# EAGLE board i2c_bridge (EAGLE 5.10)
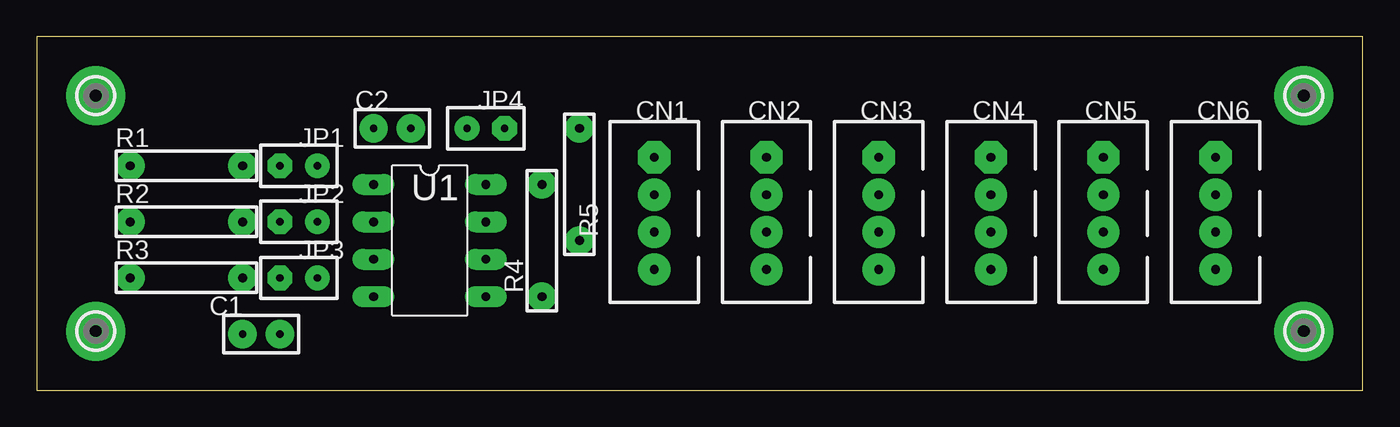
[diagram p0: board, top side]
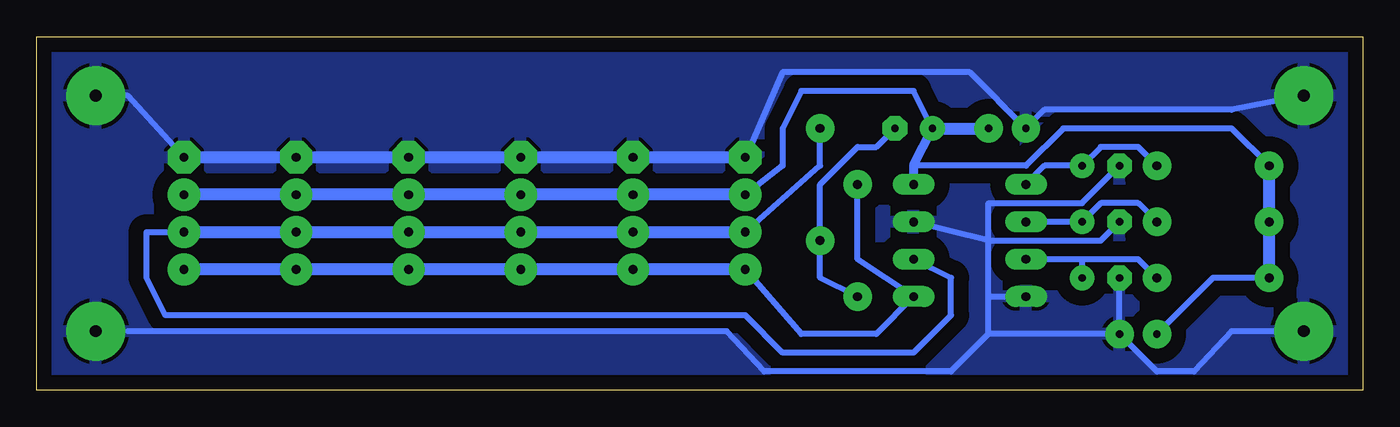
[diagram p1: board, bottom side, seen from below]

Size 90 x 24 mm. Coordinates in mm from the lower left corner, seen from the top.
Outline: 0,0 90,0 90,24 0,24 0,0
Copper layers (1*16): Top 0.035mm / dielectric 1.5mm / Bottom 0.035mm
Design rules "default": minimum track width 10mil, minimum drill 24mil, track to track 8mil, track to pad 8mil, pad to pad 8mil, via to via 8mil, smd to smd 8mil, copper to edge 40mil, drill to drill 8mil, minimum pad ring 10mil, minimum via ring 8mil, stop-mask expansion 4mil, vias tented up to drill 0mil, thermal gap 10mil

## Footprints (pad centres in the part's own frame; a part is rotated, then mirrored left to right if it is on the bottom)
CAP_DIP_1 = drill 0.5 pad 1.93 round: 1 -1.27,0; 2 1.27,0
CON_HRS_DIP_4 = drill 0.6 pad 2.184 octagon: 1 -3.81,0 | drill 0.6 pad 2.184 round: 2 -1.27,0; 3 1.27,0; 4 3.81,0
CON_PINHEAD_2 = drill 0.5 pad 1.676 octagon: 1 -1.27,0 | drill 0.5 pad 1.676 round: 2 1.27,0
PAD-2.1 = drill 0.8 pad 4 round: B2,1 0,0
R_0.125W_3 = drill 0.6 pad 1.93 round: 1 -3.81,0; 2 3.81,0
DIL8 = drill 0.6 pad 1.422 long: 1 -3.81,-3.81; 2 -1.27,-3.81; 3 1.27,-3.81; 4 3.81,-3.81; 5 3.81,3.81; 6 1.27,3.81; 7 -1.27,3.81; 8 -3.81,3.81

## Placement (x,y rotation side)
C1  0.1u  [CAP_DIP_1]  15.24,3.81 180 top
C2  0.1u  [CAP_DIP_1]  24.13,17.78 0 top
CN1  I2C#1  [CON_HRS_DIP_4]  41.91,12 270 top
CN2  I2C#2  [CON_HRS_DIP_4]  49.53,12 270 top
CN3  I2C#3  [CON_HRS_DIP_4]  57.15,12 270 top
CN4  I2C#4  [CON_HRS_DIP_4]  64.77,12 270 top
CN5  I2C#5  [CON_HRS_DIP_4]  72.39,12 270 top
CN6  I2C#6  [CON_HRS_DIP_4]  80.01,12 270 top
JP1  [CON_PINHEAD_2]  17.78,15.24 0 top
JP2  [CON_PINHEAD_2]  17.78,11.43 0 top
JP3  [CON_PINHEAD_2]  17.78,7.62 0 top
JP4  [CON_PINHEAD_2]  30.48,17.78 180 top
MT1  MOUNT-PAD2.1  [PAD-2.1]  4,20 0 top
MT2  MOUNT-PAD2.1  [PAD-2.1]  4,4 0 top
MT3  MOUNT-PAD2.1  [PAD-2.1]  86,20 0 top
MT4  MOUNT-PAD2.1  [PAD-2.1]  86,4 0 top
R1  10K  [R_0.125W_3]  10.16,15.24 180 top
R2  10K  [R_0.125W_3]  10.16,11.43 180 top
R3  10K  [R_0.125W_3]  10.16,7.62 180 top
R4  10K  [R_0.125W_3]  34.29,10.16 270 top
R5  10K  [R_0.125W_3]  36.83,13.97 270 top
U1  24LC64/256  [DIL8]  26.67,10.16 270 top

## Library data of the parts
C1 C2 CN1-CN6 JP1-JP4 MT1-MT4 R1-R5 = MyLib
U1 = IC24LCxx

## Nets
GND: C1.1 C2.1 CN1.1 CN2.1 CN3.1 CN4.1 CN5.1 CN6.1 JP1.1 JP2.1 JP3.1 MT1.B2,1 MT2.B2,1 MT3.B2,1 MT4.B2,1 U1.4 U1.7
N$1: JP1.2 R1.1 U1.1
N$2: JP2.2 R2.1 U1.2
N$3: JP3.2 R3.1 U1.3
N$4: JP4.1 R4.2 R5.2
N$6: CN1.3 CN2.3 CN3.3 CN4.3 CN5.3 CN6.3 R5.1 U1.6
N$7: CN1.4 CN2.4 CN3.4 CN4.4 CN5.4 CN6.4 R4.1 U1.5
VCC: C1.2 C2.2 CN1.2 CN2.2 CN3.2 CN4.2 CN5.2 CN6.2 JP4.2 R1.2 R2.2 R3.2 U1.8

## Tracks (layer width: path | path; a pad name or v marks a point on that pad's centre or on a via)
GND
  Bottom 0.406: C1.1 13.97,1.27 11.43,1.27 8.89,4 MT2.B2,1 | MT1.B2,1 8.89,19.05 21.59,19.05 C2.1 26.67,21.59 39.37,21.59 CN1.1 | 83.82,4 43.18,4 40.64,1.27 27.94,1.27 25.4,3.81 | C1.1 JP3.1 | 25.4,3.81 25.4,6.35 | 25.4,6.35 U1.4 | 25.4,6.35 25.4,10.16 | 25.4,10.16 U1.7 | JP2.1 17.78,10.16 25.4,10.16 | JP1.1 19.05,12.7 25.4,12.7 25.4,10.16 | C1.1 25.4,3.81 | CN6.1 83.82,20 MT3.B2,1
  Bottom 0.813: CN1.1 CN2.1 CN3.1 CN4.1 CN5.1 CN6.1
  pour Bottom (isolate 1.016): 0,24 0,0 90,0 90,24
N$1
  Bottom 0.406: U1.1 21.59,15.24 JP1.2 17.78,16.51 15.24,16.51 R1.1
N$2
  Bottom 0.406: U1.2 JP2.2 17.78,12.7 15.24,12.7 R2.1
N$3
  Bottom 0.406: R3.1 15.24,8.89 19.05,8.89 | 19.05,8.89 JP3.2 | 19.05,8.89 U1.3
N$4
  Bottom 0.406: JP4.1 33.02,16.51 34.29,16.51 36.83,13.97 R5.2 36.83,7.62 R4.2
N$6
  Bottom 0.406: R5.1 36.83,15.24 CN1.3 | U1.6 27.94,7.62 27.94,5.08 30.48,2.54 39.37,2.54 41.91,5.08 81.28,5.08 82.55,7.62 82.55,10.73 CN6.3
  Bottom 0.813: CN1.3 CN2.3 CN3.3 CN4.3 CN5.3 CN6.3
N$7
  Bottom 0.406: R4.1 34.29,8.89 U1.5 33.02,3.81 38.1,3.81 CN1.4
  Bottom 0.813: CN1.4 CN2.4 CN3.4 CN4.4 CN5.4 CN6.4
VCC
  Bottom 0.406: C1.2 10.16,7.62 R3.2 | JP4.2 30.48,20.32 38.1,20.32 39.37,17.78 39.37,15.24 CN1.2 | R1.2 8.89,17.78 20.32,17.78 22.86,15.24 30.48,15.24
  Bottom 0.61: JP4.2 30.48,15.24 U1.8
  Bottom 0.813: R3.2 R2.2 R1.2 | JP4.2 C2.2 | CN1.2 CN2.2 CN3.2 CN4.2 CN5.2 CN6.2